# Altium PCB L50T-MAUe.PcbDoc (part 2 of 2)
Units mm, origin at the board's own origin, x right, y up, seen from the top; angles counter-clockwise.
Board outline 170.25 x 235.25 mm, 2 copper layers (Top Layer, Bottom Layer); 116 components, 84 nets, 377 pads, 326 vias.
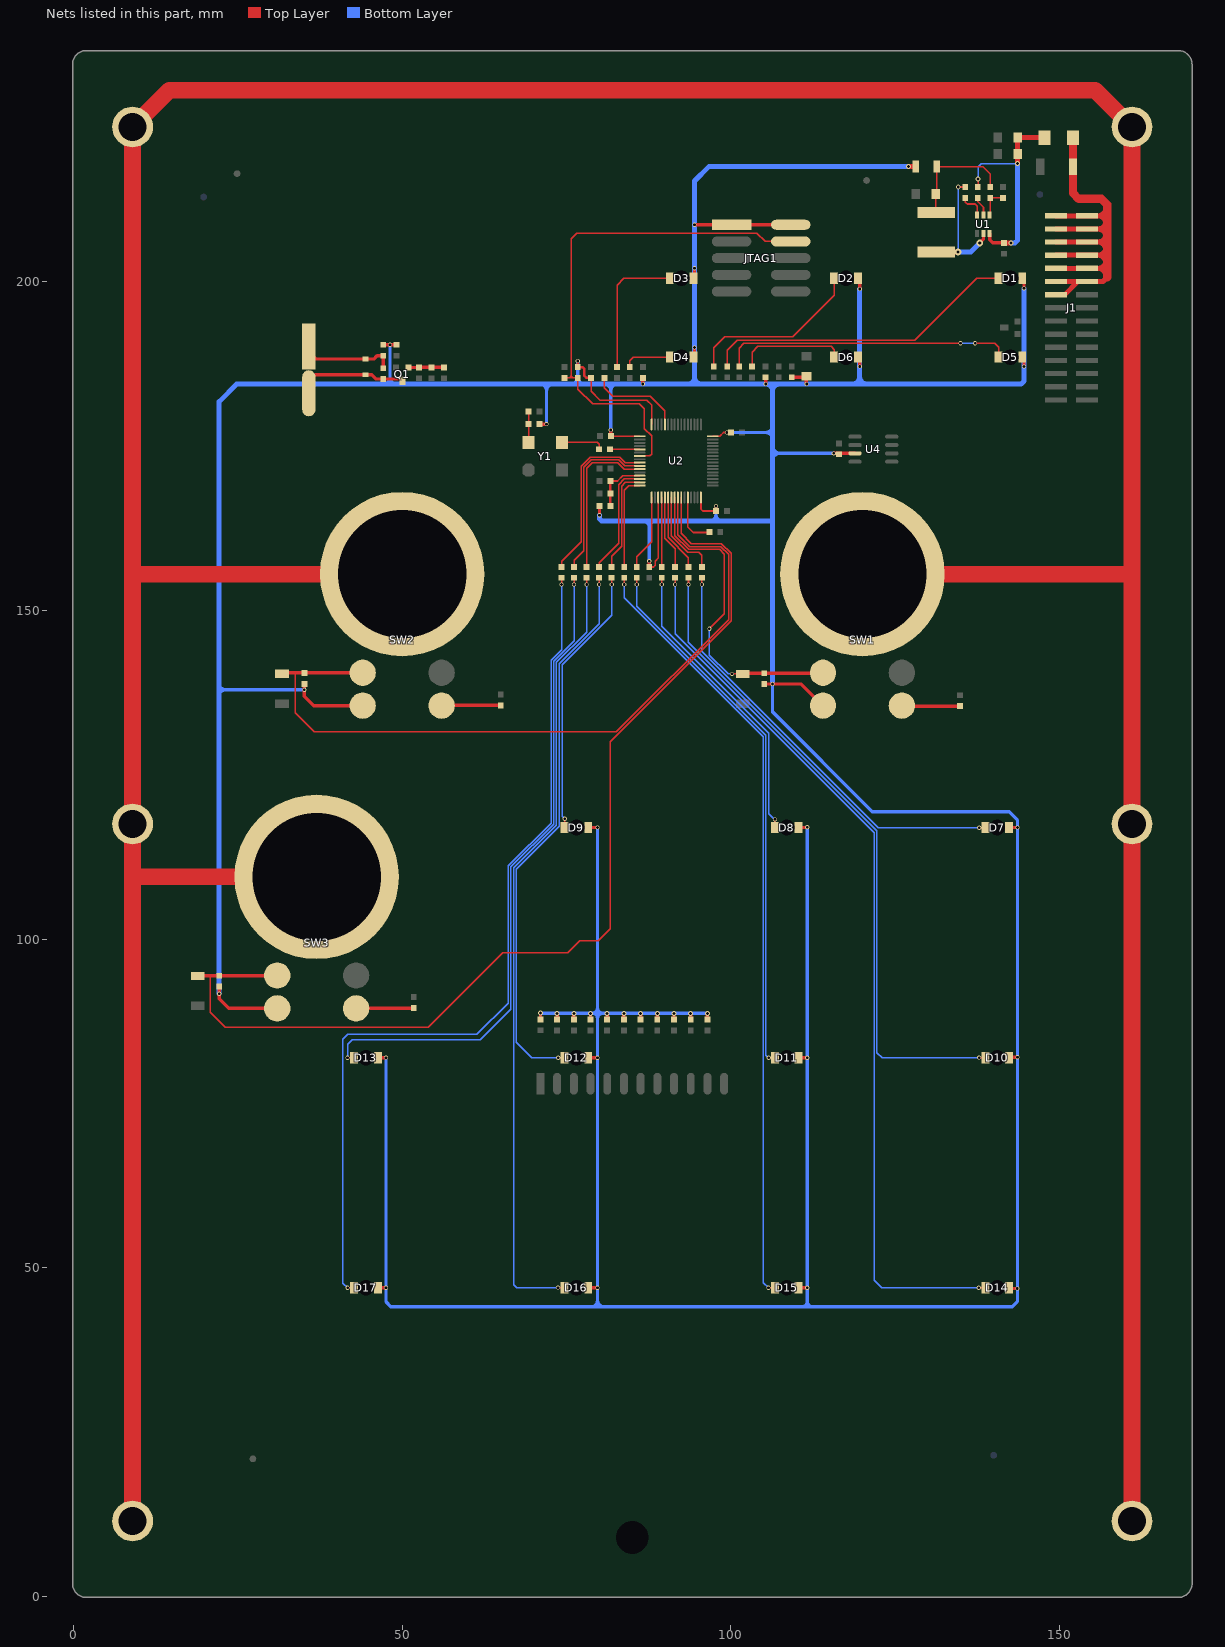
[diagram p2: the nets of this part, all layers, seen from the top]

## Via types
v1: diameter 0.635, hole 0.406, Top Layer to Bottom Layer, tented both sides, 289 vias
v2: diameter 0.762, hole 0.457, Top Layer to Bottom Layer, tented both sides, 34 vias
v3: diameter 1.016, hole 0.508, Top Layer to Bottom Layer, tented both sides, 2 vias
v4: diameter 0.711, hole 0.406, Top Layer to Bottom Layer, tented both sides, 1 vias

## Nets (pads, with @x,y where several pads share a name; then routed paths per layer and width w, separated by ;. In a path a pad name is that pad's centre, name@x,y a point inside that pad or via, vN(x,y) a via of type N, cw(c..) or ccw(c..) an arc to the next point about the centre after c; other vN are vias at no path point) (continued)
NetC4_1: C4.1 L1.1 U1.2 | length 19.8
  Top Layer w0.254: v4(134.567,214.376) C4.1@135.636,214.376
  Top Layer w0.508: v3(137.856,205.854) 138.405,206.403 U1.2@138.405,207.312
  Top Layer w0.762: L1.1@131.242,204.493 v3(134.544,204.493)
  Bottom Layer w0.254: v3@134.567,204.493 134.567,206.5 v4(134.567,214.376)
  Bottom Layer w0.762: v3(134.544,204.493) 134.567,204.493 136.495,204.493 v3(137.856,205.854)
NetC4_2: C4.2 U1.6 | length 4.1
  Top Layer w0.254: C4.2@135.636,212.725 135.636,212.065 135.915,211.785 137.132,211.785 137.455,211.463 U1.6@137.455,210.112
NetC5_2: C5.2 F1.1 L1.2 R5.1 | length 17.9
  Top Layer w0.254: L1.2@131.242,210.493 131.166,210.569 C5.2@131.166,213.335 C5.2@131.292,213.461 ; C5.2@131.432,213.601 C5.2@131.292,213.461 ; R5.1@139.446,214.376 139.446,216.355 138.326,217.475 F1.1@131.292,217.475 C5.2@131.292,213.461
NetC7_1: C7.1 D18.2 R12.1 U3.1 | length 14.7
  Top Layer w0.508: U3.1@35.814,190.119 35.814,189.304 36.904,188.214 D18.2@44.45,188.214 45.667,188.214 46.175,188.722 R12.1@47.117,188.722 C7.1@47.117,186.817
NetC7_2: C7.2 D18.1 Q1.3 U3.2 | length 16.8
  Top Layer w0.508: U3.2@35.814,183.007 35.814,184.838 36.777,185.801 D18.1@44.45,185.801 45.413,185.801 46.048,185.166 C7.2@47.117,185.166 49.77,185.166 Q1.3@50.038,184.898
NetC8_2: C8.2 Q1.1 R17.2 R19.2 | length 5.4
  Top Layer w0.508: Q1.1@50.978,186.93 52.564,186.93 C8.2@52.578,186.944 R19.2@54.483,186.944 R17.2@56.388,186.944
NetC9_1: C9.1 FB1.1 Y1.4 | length 4.7
  Top Layer w0.203: Y1.4@69.215,175.523 FB1.1@69.215,178.308 C9.1@69.215,180.213
NetD1_2: D1.2 R1.2 | length 48.2
  Top Layer w0.203: R1.2@99.441,187.096 99.441,189.535 100.99,191.084 127.94,191.084 137.356,200.5 D1.2@140.7,200.5
NetD2_2: D2.2 R8.2 | length 27
  Top Layer w0.203: R8.2@97.384,187.096 97.384,189.89 99.085,191.592 109.372,191.592 115.7,197.92 D2.2@115.7,200.5
NetD3_2: D3.2 R6.2 | length 20.9
  Top Layer w0.203: R6.2@82.677,186.995 82.677,199.441 83.736,200.5 D3.2@90.7,200.5
NetD4_2: D4.2 R9.2 | length 7.3
  Top Layer w0.203: R9.2@84.607,186.995 84.607,187.96 85.166,188.519 90.681,188.519 D4.2@90.7,188.5
NetD5_2: D5.2 R10.2 | length 44.3
  Top Layer w0.203: R10.2@101.27,187.096 101.27,189.865 101.981,190.576 v1@134.925,190.576 ; v1(137.135,190.602) 140.132,190.602 140.7,190.033 D5.2@140.7,188.5
  Bottom Layer w0.203: v1(134.925,190.602) v1(137.135,190.602)
NetD6_2: D6.2 R11.2 | length 16.4
  Top Layer w0.203: R11.2@103.226,187.071 103.226,189.281 104.064,190.119 115.24,190.119 115.7,189.659 D6.2@115.7,188.5
NetD7_2: D7.2 R24.2 | length 65.5
  Top Layer w0.203: v1@137.726,116.96 D7.2@138.7,116.96
  Top Layer w0.254: v1(95.578,153.924) R24.2@95.578,154.94
  Bottom Layer w0.203: v1(95.578,153.924) 95.578,143.764 122.382,116.96 137.751,116.96 v1(137.77,116.942)
NetD8_2: D8.2 R25.2 | length 45.2
  Top Layer w0.203: D8.2@106.7,116.96 v1(106.7,118.206)
  Top Layer w0.254: v1(89.482,153.924) R25.2@89.482,154.94
  Bottom Layer w0.203: v1(89.482,153.924) 89.482,147.574 105.738,131.318 105.738,119.075 106.607,118.206 v1(106.7,118.206)
NetD9_2: D9.2 R29.2 | length 41.2
  Top Layer w0.203: D9.2@74.7,116.96 74.727,116.987 v1(74.727,118.288)
  Top Layer w0.254: v1(81.862,153.924) R29.2@81.862,154.94
  Bottom Layer w0.203: v1(74.727,118.288) 74.369,118.646 74.369,141.732 81.862,149.225 v1(81.862,153.924)
NetD10_2: D10.2 R30.2 | length 100.9
  Top Layer w0.254: v1(93.546,153.924) R30.2@93.546,154.94 ; v1(137.744,81.966) 137.75,81.96 D10.2@138.7,81.96
  Bottom Layer w0.203: v1(93.546,153.924) 93.546,145.161 122.204,116.503 122.204,82.748 122.987,81.966 v1(137.744,81.966)
NetD11_2: D11.2 R31.2 | length 82.3
  Top Layer w0.203: v1(105.74,81.96) D11.2@106.7,81.96
  Top Layer w0.254: v1(85.672,153.924) R31.2@85.672,154.94
  Bottom Layer w0.203: v1(85.672,153.924) 85.672,150.622 105.332,130.962 105.332,82.369 v1(105.74,81.96)
NetD12_2: D12.2 R32.2 | length 84.2
  Top Layer w0.203: v1(73.742,81.96) D12.2@74.7,81.96
  Top Layer w0.254: v1(79.957,153.924) R32.2@79.957,154.94
  Bottom Layer w0.203: v1(73.742,81.96) 69.727,81.96 67.359,84.328 67.359,110.642 73.861,117.145 73.861,141.859 79.957,147.955 v1(79.957,153.924)
NetD13_2: D13.2 R33.2 | length 99.7
  Top Layer w0.203: v1(41.701,81.96) D13.2@42.7,81.96 ; v1(76.147,153.924) R33.2@76.147,154.94
  Bottom Layer w0.203: v1(41.701,81.96) 41.701,83.967 42.393,84.658 61.898,84.658 66.546,89.306 66.546,110.979 73.048,117.481 73.048,142.256 76.147,145.355 v1(76.147,153.924)
NetD14_2: D14.2 R34.2 | length 136.8
  Top Layer w0.203: v1(137.698,46.96) D14.2@138.7,46.96
  Top Layer w0.254: v1(91.514,153.924) R34.2@91.514,154.94
  Bottom Layer w0.203: v1(91.514,153.924) 91.514,146.431 121.798,116.147 121.793,116.142 121.793,48.082 122.915,46.96 v1(137.698,46.96)
NetD15_2: D15.2 R35.2 | length 118.1
  Top Layer w0.203: v1(105.715,46.96) D15.2@106.7,46.96
  Top Layer w0.254: v1(83.767,153.924) R35.2@83.767,154.94
  Bottom Layer w0.203: v1(83.767,153.924) 83.767,151.916 104.925,130.758 104.925,47.75 v1(105.715,46.96)
NetD16_2: D16.2 R36.2 | length 120
  Top Layer w0.203: v1@73.711,46.965 73.715,46.96 D16.2@74.7,46.96 ; v1(78.052,153.924) R36.2@78.052,154.94
  Bottom Layer w0.203: v1(73.711,46.99) 67.412,46.99 66.952,47.449 66.952,110.811 73.455,117.313 73.455,142.088 78.052,146.685 v1(78.052,153.924)
NetD17_2: D17.2 R38.2 | length 134.6
  Top Layer w0.203: v1(41.711,46.96) D17.2@42.7,46.96 ; v1(74.242,153.924) R38.2@74.242,154.94
  Bottom Layer w0.203: v1(41.711,46.96) 40.996,47.676 40.996,84.785 41.707,85.496 61.364,85.496 66.139,90.272 66.139,111.147 72.642,117.65 72.642,142.424 74.242,144.024 v1(74.242,153.924)
NetR2_2: R2.2 U2.60 | length 14.2
  Top Layer w0.203: R2.2@80.77,185.344 80.77,183.822 82.017,182.575 87.706,182.575 89.944,180.337 U2.60@89.944,178.27
NetR3_2: R3.2 U2.28 | length 8.2
  Top Layer w0.254: U2.28@93.464,167.15 U2.28@93.444,167.17 93.444,162.662 94.263,161.843 96.639,161.843 R3.2@96.721,161.925
NetR4_1: R4.1 U1.5 | length 3
  Top Layer w0.254: R4.1@137.541,212.725 137.541,212.164 138.405,211.3 U1.5@138.405,210.112
NetR5_2: R5.2 R7.1 U1.4 | length 4.6
  Top Layer w0.254: U1.4@139.355,210.112 139.446,210.203 R5.2@139.446,212.725 R7.1@141.351,212.725
NetR20_2: R20.2 Y1.3 | length 6.5
  Top Layer w0.203: Y1.3@74.295,175.523 79.694,175.523 79.957,175.26 R20.2@79.957,174.498
NetR26_2: R26.2 SW1.4 | length 8.8
  Top Layer w0.508: SW1.4@126,135.5 126.067,135.433 R26.2@134.821,135.433
NetR27_2: R27.2 SW2.4 | length 9
  Top Layer w0.508: SW2.4@56,135.5 56.034,135.534 R27.2@64.996,135.534
NetR28_2: R28.2 SW3.4 | length 8.8
  Top Layer w0.508: SW3.4@43,89.46 51.688,89.46 R28.2@51.763,89.535
NRST: CU2.2 JTAG1.4 R16.1 U2.7 | length 81.1
  Top Layer w0.203: CU2.2@74.674,185.344 75.286,185.344 ; 76.098,185.344 cw(c76.097,185.751) 76.096,185.344 ; U2.7@86.144,173.47 87.643,173.47 87.935,173.761 87.935,176.53 86.817,177.648 86.817,180.645 86.081,181.381 78.969,181.381 76.706,183.644 R16.1@76.706,185.344 76.096,185.344 ; JTAG1.4@109.097,206.096 105.207,206.096 103.937,207.366 76.556,207.366 75.69,206.5 75.69,185.75 75.69,185.748 ; 75.286,185.344 ccw(c75.285,185.749) 75.69,185.748 ; 75.286,185.344 75.69,185.344 ; 75.69,185.344 76.096,185.344 ; 75.69,185.344 75.69,185.748 ; 75.69,185.748 ccw(c75.285,185.749) 75.69,185.749 ccw(c76.097,185.751) 75.69,185.748 ; 75.69,185.748 ccw(c76.097,185.751) 76.096,185.344
OSC_IN: R20.1 U2.5 | length 4.5
  Top Layer w0.203: R20.1@81.636,174.47 U2.5@86.144,174.47
  Top Layer w0.254: R20.1@81.608,174.498 R20.1@81.636,174.47
PG: I1.1 I2.1 I3.1 I4.1 I5.1 I6.1 SW1.0 SW2.0 SW3.0 | length 690.6
  Top Layer w2.54: I5.1@9,11.5 I3.1@9,117.5 9,155.423 ; 9.09,109.46 SW3.0@37,109.46 ; SW2.0@50,155.5 9.077,155.5 9,155.423 ; SW1.0@120,155.5 160.973,155.5 ; I6.1@161,11.5 I4.1@161,117.5 I2.1@161,223.5 155.392,229.108 14.608,229.108 I1.1@9,223.5 9,155.423
SIGNAL1: R23.1 SW3.1 U2.26 Z3.1 | length 164.7
  Top Layer w0.203: 20.803,94.412 20.803,88.875 23.089,86.589 53.973,86.589 65.301,97.917 75.182,97.917 77.036,99.771 79.794,99.771 81.623,101.6 81.623,130.002 100.048,148.428 100.048,158.658 98.551,160.155 93.974,160.155 92.444,161.685 U2.26@92.444,167.17
  Top Layer w0.508: Z3.1@18.921,94.386 18.946,94.412 20.803,94.412 R23.1@22.172,94.412 30.952,94.412 SW3.1@31,94.46
SIGNAL2: R22.1 SW2.1 U2.25 Z2.1 | length 117.1
  Top Layer w0.203: 33.706,140.5 33.706,134.417 36.601,131.521 82.567,131.521 99.642,148.596 99.642,158.49 98.477,159.655 93.767,159.655 91.944,161.478 U2.25@91.944,167.17
  Top Layer w0.508: Z2.1@31.748,140.335 31.913,140.5 33.706,140.5 SW2.1@44,140.5
SIGNAL3: R21.1 SW1.1 U2.24 Z1.1 | length 49.4
  Top Layer w0.203: U2.24@91.444,167.17 91.489,167.125 91.489,161.358 93.598,159.249 98.308,159.249 99.007,158.55 99.007,149.479 v1(96.721,147.193) ; v1(100.15,140.335) 101.776,140.335 Z1.1@101.801,140.31
  Top Layer w0.508: Z1.1@101.801,140.31 101.928,140.437 R21.1@105.078,140.437 113.937,140.437 SW1.1@114,140.5
  Bottom Layer w0.203: v1(96.721,147.193) 96.721,143.196 99.582,140.335 v1(100.15,140.335)
SPS12V: C1.2 C2.2 C3.1 D19.2 R4.2 U1.3 | length 34.6
  Top Layer w0.254: R4.2@137.541,214.376 137.59,214.425 v2(137.59,215.595)
  Top Layer w0.508: U1.3@139.355,207.312 139.355,206.337 139.812,205.88 C3.1@141.554,205.88
  Top Layer w0.762: C3.1@141.554,205.88 v2(142.568,205.88) ; v2(143.612,217.932) C2.2@143.612,219.38 C1.2@143.612,221.869 D19.2@147.701,221.869
  Bottom Layer w0.254: v2(137.59,215.595) 137.59,217.449 138.072,217.932 v2(143.612,217.932)
  Bottom Layer w0.762: v2(142.568,205.88) 143.216,205.88 143.612,206.276 v2(143.612,217.932)
SPS_12V: D19.1 D20.2 J1.1 J1.2 J1.3 J1.4 J1.5 J1.6 J1.7 J1.8 J1.9 J1.10 J1.11 J1.12 J1.13 | length 101
  Top Layer w0.762: J1.13@149.454,198 150.756,198 J1.12@152.756,200 ; J1.11@149.454,200 J1.12@152.756,200 ; J1.9@149.454,202 J1.10@154.153,202 155.981,202 ; J1.7@149.454,204 J1.8@154.153,204 155.981,204 ; J1.5@149.454,206 J1.6@154.153,206 155.981,206 ; J1.3@149.454,208 J1.4@154.153,208 155.981,208 ; J1.1@149.454,210 J1.2@154.153,210 157.142,210 ; D20.2@152.015,217.424 152.015,221.865 D19.1@152.019,221.869 ; 155.956,210 ccw(c155.762,211.261) 157.023,211.455 ; 155.981,208.001 ccw(c155.88,209.144) 157.019,209.003 ; 156.007,210 cw(c155.731,208.708) 157.019,209.003 ; 157.023,202.463 ccw(c155.734,202.711) 157.024,202.953 ; 157.023,204.47 ccw(c155.737,204.714) 157.023,204.956 ; 157.023,206.4 ccw(c155.703,206.679) 157.014,206.997 ; 157.023,207.518 cw(c155.743,207.28) 157.014,206.997 ; 157.023,208.432 ccw(c155.731,208.708) 157.019,209.003 ; 157.023,209.245 cw(c155.88,209.144) 157.019,209.003 ; 157.048,203.505 cw(c155.762,203.286) 157.024,202.953 ; 157.048,205.537 cw(c155.746,205.302) 157.023,204.956 ; 157.06,204 155.981,204 ; 157.13,206 155.981,206 ; 157.194,202 155.981,202 ; 157.226,200.635 157.048,200.457 ; 157.226,208.229 156.996,208 155.981,208 ; J1.12@152.756,200 J1.12@154.153,200 156.591,200 157.048,200.457 ; 155.981,202 cw(c155.743,200.695) 157.048,200.457 ; 155.981,202 ccw(c155.762,203.286) 157.024,202.953 ; 155.981,204 ccw(c155.746,205.302) 157.023,204.956 ; 155.981,204 cw(c155.734,202.711) 157.024,202.953 ; 155.981,206 ccw(c155.743,207.28) 157.014,206.997 ; 155.981,206 cw(c155.737,204.714) 157.023,204.956 ; 155.981,208 cw(c155.703,206.679) 157.014,206.997
  Top Layer w1.27: D19.1@152.019,221.869 152.019,217.428 D20.2@152.015,217.424 152.015,213.44 152.883,212.573 156.362,212.573 157.226,211.709 157.226,208.229 157.226,200.635
STEP0: R24.1 U2.23 | length 13.5
  Top Layer w0.203: U2.23@90.944,167.17 90.944,161.328 93.43,158.842 95.105,158.842 95.578,158.369 R24.1@95.578,156.591
STEP1: R25.1 U2.20 | length 10.7
  Top Layer w0.203: R25.1@89.228,156.591 89.444,156.807 U2.20@89.444,167.17
STEP2: R29.1 U2.15 | length 15.9
  Top Layer w0.203: R29.1@81.862,156.591 81.862,158.242 83.361,159.741 83.361,168.885 83.946,169.47 U2.15@86.144,169.47
STEP4: R30.1 U2.22 | length 11.9
  Top Layer w0.203: U2.22@90.444,167.17 90.444,161.09 93.546,157.988 R30.1@93.546,156.591
STEP5: R31.1 U2.17 | length 11.5
  Top Layer w0.203: R31.1@85.672,156.591 85.672,158.115 87.944,160.387 U2.17@87.944,167.17
STEP6: R32.1 U2.14 | length 17.3
  Top Layer w0.203: R32.1@79.957,156.591 79.957,157.226 82.954,160.223 82.954,169.113 83.811,169.97 U2.14@86.144,169.97
STEP7: R33.1 U2.10 | length 25.1
  Top Layer w0.203: R33.1@76.147,156.591 76.147,157.607 77.62,159.08 77.62,171.756 78.737,172.872 82.955,172.872 83.858,171.97 U2.10@86.144,171.97
STEP8: R34.1 U2.21 | length 11.2
  Top Layer w0.203: U2.21@89.944,167.17 89.944,160.955 91.514,159.385 R34.1@91.514,156.591
STEP9: R35.1 U2.16 | length 14.3
  Top Layer w0.203: R35.1@83.767,156.591 83.767,168.275 84.462,168.97 U2.16@86.144,168.97
STEP10: R36.1 U2.11 | length 23.9
  Top Layer w0.203: R36.1@78.052,156.591 78.052,171.577 78.941,172.466 82.751,172.466 83.747,171.47 U2.11@86.144,171.47
STEP11: R38.1 U2.9 | length 26.4
  Top Layer w0.203: R38.1@74.242,156.591 74.242,157.48 77.214,160.452 77.214,171.924 78.568,173.279 83.124,173.279 83.932,172.47 U2.9@86.144,172.47
V3.3: C6.1 C10.2 C12.1 CU1.2 CU4.2 CU5.2 CU6.2 CU7.2 D1.1 D2.1 D3.1 D4.1 D5.1 D6.1 D7.1 D8.1 D9.1 D10.1 D11.1 D12.1 D13.1 D14.1 D15.1 D16.1 D17.1 F1.2 FB1.2 FB2.1 JTAG1.1 JTAG1.2 R12.2 R13.2 R14.2 R15.2 R16.2 R21.2 R22.2 R23.2 R40.1 R41.1 R42.1 R43.1 R44.1 R45.1 R46.1 R47.1 R48.1 R49.1 R50.1 SW1.3 SW2.3 SW3.3 U2.1 U2.19 U2.32 U2.48 U2.64 U4.3 | length 1056.7
  Top Layer w0.254: CU7.2@78.738,185.344 78.738,183.314 80.086,181.966 87.198,181.966 87.944,181.22 U2.64@87.944,178.27 ; CU4.2@81.735,176.53 81.795,176.47 U2.1@86.144,176.47 ; CU5.2@87.577,156.591 88.212,156.591 88.466,156.845 88.466,157.48 88.944,157.958 U2.19@88.944,167.17 ; U2.32@95.444,167.17 95.444,165.361 95.705,165.1 CU6.2@97.737,165.1 ; U2.48@97.244,176.47 98.312,176.47 98.88,177.038 v1(99.388,177.038) CU1.2@100.023,177.038
  Top Layer w0.381: v1(76.706,187.909) R16.2@76.706,186.995 77.445,186.995 77.724,186.715 77.724,185.674 78.054,185.344 CU7.2@78.738,185.344
  Top Layer w0.508: R23.2@22.172,92.761 v1(22.172,91.694) 22.172,90.932 23.644,89.46 SW3.3@31,89.46 ; R22.2@35.126,138.811 v1(35.126,137.922) 35.126,136.906 36.532,135.5 SW2.3@44,135.5 ; D17.1@46.3,46.96 v1(47.544,46.96) ; D13.1@46.3,81.96 v1@47.543,81.96 ; R12.2@47.117,190.373 v1(48.156,190.373) C6.1@49.149,190.373 ; FB1.2@70.866,178.308 v1(71.956,178.308) ; R40.1@71.03,87.782 v2(71.03,88.722) ; R41.1@73.571,87.757 v2(73.571,88.697) ; R42.1@76.111,87.757 v2(76.111,88.697) ; D16.1@78.3,46.96 v1(79.705,46.96) ; D12.1@78.3,81.96 v1(79.699,81.96) ; D9.1@78.3,116.96 v1(79.698,116.96) ; R43.1@78.638,87.757 v2(78.638,88.697) ; v1(80.01,164.465) FB2.1@80.01,165.862 ; R44.1@81.179,87.757 v2(81.179,88.697) ; CU4.2@81.735,176.53 v1(81.735,177.419) ; R45.1@83.719,87.757 v2(83.719,88.697) ; R46.1@86.26,87.757 v2(86.26,88.697) ; v1@86.612,184.406 R15.2@86.612,185.344 ; CU5.2@87.577,156.591 v1(87.577,157.48) ; R47.1@88.8,87.757 v2(88.8,88.697) ; R48.1@91.341,87.757 v2(91.341,88.697) ; R49.1@93.882,87.757 v2(93.882,88.697) ; D4.1@94.3,188.5 94.463,188.663 v1(94.463,189.967) ; D3.1@94.3,200.5 94.463,200.663 v1(94.463,202.032) ; v1(94.463,208.636) JTAG1.1@100.097,208.636 JTAG1.2@109.097,208.636 ; R50.1@96.422,87.757 v2(96.422,88.697) ; CU6.2@97.737,165.1 v1(97.737,165.862) ; R21.2@105.078,138.786 v1(106.322,138.786) 110.714,138.786 SW1.3@114,135.5 ; v1(105.281,184.406) R14.2@105.281,185.443 ; R13.2@109.243,185.443 111.326,185.443 C10.2@111.481,185.598 111.481,184.429 v1(111.506,184.404) ; D15.1@110.3,46.96 v1(111.603,46.96) ; D11.1@110.3,81.96 v1(111.602,81.96) ; D8.1@110.3,116.96 v1@111.601,116.96 ; v1(115.644,173.863) U4.3@118.872,173.863 ; D6.1@119.3,188.5 119.583,188.217 v1(119.583,187.071) ; D2.1@119.3,200.5 119.583,200.217 v1(119.583,198.857) ; v2@126.947,217.424 v2(126.998,217.475) ; D14.1@142.3,46.96 142.397,46.863 v1(143.561,46.863) ; D10.1@142.3,81.96 142.357,82.017 v1(143.579,82.017) ; D7.1@142.3,116.96 v1(143.579,116.96) ; D5.1@144.3,188.5 144.577,188.223 v1(144.577,187.071) ; D1.1@144.3,200.5 144.577,200.223 v1(144.577,198.958)
  Top Layer w0.762: v2(126.998,217.475) F1.2@128.092,217.475
  Bottom Layer w0.381: 76.706,184.482 76.784,184.404
  Bottom Layer w0.508: 22.172,137.033 cw(c23.125,136.97) 23.061,137.922 ; 22.172,137.922 23.061,137.922 ; 22.172,138.938 ccw(c23.124,138.874) 22.172,138.811 ccw(c23.124,138.874) 23.061,137.922 ; 23.188,137.922 ccw(c23.125,136.97) 23.061,137.922 ; v1(35.126,137.922) 23.061,137.922 ; 47.191,184.404 ccw(c47.166,185.395) 48.156,185.369 ; v1(47.549,81.966) 47.549,44.806 48.285,44.069 78.791,44.069 ; 48.156,184.48 48.156,185.344 ; v1(48.156,190.373) 48.156,185.42 ; 48.918,184.404 ccw(c49.007,185.255) 49.096,184.404 cw(c49.109,185.357) 48.156,185.344 ; 70.94,184.404 cw(c70.94,183.388) 71.956,183.388 ; v2(71.03,88.722) 79.705,88.722 ; v1(71.956,178.308) 71.956,183.388 ; 71.956,184.404 71.956,183.388 ; 72.972,184.404 ccw(c72.972,183.388) 71.956,183.388 ; 75.616,184.404 ccw(c75.602,185.508) 76.706,185.494 ; 76.706,184.482 76.706,185.494 ; 76.706,185.522 cw(c75.602,185.508) 76.706,185.494 ; v1(76.706,187.909) 76.706,185.494 ; 76.708,185.522 ccw(c77.813,185.509) 77.8,184.404 ; 78.765,44.069 ccw(c78.778,44.996) 78.791,44.069 ; v1(79.698,116.96) 79.705,89.431 ; 80.719,184.404 cw(c80.719,183.388) 81.735,183.388 ; 81.608,184.404 81.735,184.277 81.735,183.388 ; v1(81.735,177.419) 81.735,183.388 ; 82.751,184.404 ccw(c82.751,183.388) 81.735,183.388 ; 86.307,163.576 cw(c86.498,162.497) 86.688,163.576 ; 86.815,163.449 cw(c86.815,162.687) 87.577,162.687 cw(c88.529,162.624) 88.466,163.576 ; v1(87.577,157.48) 87.577,163.449 ; v2(96.422,88.697) 96.397,88.722 80.518,88.722 ; 96.721,163.576 ccw(c96.721,164.592) 97.735,164.527 ; v1(97.737,165.862) 97.737,164.465 ; 97.864,163.576 97.737,163.703 97.737,164.465 ; 98.626,163.576 cw(c98.689,164.528) 97.737,164.465 ; v1(99.388,177.038) 105.23,177.038 ; v1(106.322,138.786) 106.322,134.544 121.486,119.38 142.316,119.38 143.579,118.117 v1(143.579,116.96) v1(143.579,82.017) 143.579,44.875 142.773,44.069 112.395,44.069 ; 106.322,172.847 cw(c107.427,172.758) 107.338,173.863 ; 106.322,173.863 107.338,173.863 ; 106.322,175.26 ccw(c107.554,175.095) 106.322,174.93 ccw(c107.554,175.095) 107.373,173.865 ; 106.322,176.022 ccw(c105.268,175.984) 105.306,177.038 ; 106.322,177.038 105.306,177.038 ; 106.322,178.054 cw(c105.268,178.092) 105.306,177.038 ; 107.389,173.863 cw(c107.554,175.095) 107.373,173.865 ; 107.516,173.863 ccw(c107.427,172.758) 107.373,173.865 ; 110.846,44.069 ccw(c110.82,44.856) 111.608,44.831 ; v1(111.608,116.992) 111.608,44.882 ; v1(115.644,173.863) 107.338,173.863 ; 48.156,185.344 cw(c49.109,185.357) 48.156,185.369 ; 48.156,185.344 48.156,185.369 ; 48.156,185.369 ccw(c47.166,185.395) 48.156,185.42 ; 48.156,185.369 48.156,185.42 ; 78.791,44.069 ccw(c78.778,44.996) 79.705,44.983 ; 78.791,44.069 79.781,44.069 ; 79.705,44.983 ccw(c80.721,45.085) 80.62,44.069 ; 79.705,44.983 v1(79.705,46.96) 79.705,88.722 ; 79.705,44.983 79.705,44.145 79.781,44.069 ; 79.705,88.722 79.705,89.431 ; 79.705,88.722 80.416,88.722 ; 79.705,89.431 cw(c78.943,89.484) 78.994,88.722 cw(c78.994,88.011) 79.705,88.011 cw(c80.467,87.96) 80.416,88.722 ; 79.705,89.431 ccw(c78.943,89.484) 79.707,89.483 ; 79.707,89.483 ccw(c78.943,89.484) 79.705,89.535 ccw(c80.518,89.535) 79.707,89.483 ; 79.707,89.483 ccw(c80.518,89.535) 80.466,88.724 ; 79.781,44.069 80.62,44.069 ; 80.416,88.722 cw(c80.467,87.96) 80.466,88.724 ; 80.416,88.722 80.518,88.722 ; 80.466,88.724 cw(c80.467,87.96) 80.518,88.722 ; 80.466,88.724 ccw(c80.518,89.535) 80.518,88.722 ; 80.62,44.069 ccw(c80.721,45.085) 80.823,44.069 ; 80.62,44.069 80.823,44.069 ; 80.823,44.069 111.608,44.069 ; 97.735,164.527 ccw(c98.689,164.528) 97.737,164.465 ; 97.735,164.527 ccw(c96.721,164.592) 97.737,164.592 ccw(c98.689,164.528) 97.735,164.527 ; 105.23,177.038 ccw(c105.268,178.092) 105.306,177.038 ; 105.23,177.038 cw(c105.268,175.984) 105.306,177.038 ; 105.23,177.038 105.306,177.038 ; 107.338,173.863 cw(c107.427,172.758) 107.373,173.865 ; 111.608,44.069 111.608,44.831 ; 111.608,44.069 112.395,44.069 ; 111.608,44.831 ccw(c110.82,44.856) 111.608,44.844 ; 111.608,44.831 111.608,44.856 ; 111.608,44.844 cw(c112.408,44.869) 111.608,44.856 ; 111.608,44.844 ccw(c110.82,44.856) 111.608,44.882 ; 111.608,44.844 ccw(c112.408,44.869) 112.395,44.069 ; 111.608,44.856 cw(c112.408,44.869) 111.608,44.882 ; 111.608,44.856 111.608,44.882
  Bottom Layer w0.762: v1(22.172,91.694) 22.172,137.922 22.172,138.811 22.172,138.938 22.172,181.737 24.839,184.404 48.918,184.404 49.096,184.404 70.94,184.404 71.956,184.404 72.972,184.404 75.616,184.404 76.784,184.404 77.8,184.404 80.719,184.404 81.608,184.404 82.751,184.404 v1(86.614,184.404) 92.098,184.404 ; v1(80.01,164.465) 80.01,163.904 80.338,163.576 86.307,163.576 88.466,163.576 96.721,163.576 97.864,163.576 106.322,163.576 ; 92.225,184.404 92.098,184.404 ; 93.523,184.404 ccw(c93.485,185.382) 94.463,185.344 ; 95.479,184.404 cw(c95.479,185.42) 94.463,185.381 ; v1@105.23,184.404 cw(c105.306,183.388) v1@105.382,184.404 ; v1(106.322,138.786) 106.322,163.576 ; v1(119.583,198.857) v1(119.583,187.071) 119.583,185.445 ; 120.777,184.404 cw(c120.701,185.522) 120.625,184.404 ; v2(126.998,217.475) 96.647,217.475 94.463,215.29 v1(94.463,208.636) v1(94.463,202.032) v1(94.463,189.967) 94.463,185.42 ; v1(144.577,198.958) v1(144.577,187.071) 144.577,184.836 144.145,184.404 120.625,184.404 ; 92.098,184.404 94.469,184.404 ; 94.463,185.344 ccw(c93.485,185.382) 94.463,185.381 ; 94.463,185.344 94.463,185.42 ; 94.463,185.344 94.463,184.41 94.469,184.404 ; 94.463,185.42 ccw(c95.479,185.42) 94.463,185.381 ; 94.463,185.42 cw(c93.485,185.382) 94.463,185.381 ; 94.469,184.404 102.258,184.404 v1@105.382,184.404 ; v1@105.382,184.404 cw(c105.306,183.388) 106.322,183.464 ; v1@105.382,184.404 106.322,184.404 ; 106.322,163.576 106.322,172.847 106.322,173.863 106.322,174.93 106.322,175.26 106.322,176.022 106.322,177.038 106.322,178.054 106.322,183.464 ; 106.322,183.464 cw(c107.364,183.363) 107.262,184.404 ; 106.322,183.464 106.322,184.404 ; 106.322,184.404 107.262,184.404 ; 107.262,184.404 v1(111.506,184.404) 118.415,184.404 ; 118.415,184.404 ccw(c118.478,185.509) 118.542,184.404 ; 118.415,184.404 118.542,184.404 ; 118.542,184.404 ccw(c118.478,185.509) 119.583,185.445 ; 118.542,184.404 119.583,184.404 ; 119.583,184.404 119.583,185.445 ; 119.583,184.404 120.625,184.404 ; 119.583,185.445 ccw(c120.701,185.522) 120.625,184.404
V3.3A: CU3.1 CU8.1 FB2.2 U2.13 | length 8.6
  Top Layer w0.254: CU8.1@81.661,169.672 82.751,169.672 83.549,170.47 U2.13@86.144,170.47
  Top Layer w0.381: FB2.2@81.661,165.862 CU3.1@81.661,167.767 CU8.1@81.661,169.672
pads on no net: D1.0 D2.0 D3.0 D4.0 D5.0 D6.0 D7.0 D8.0 D9.0 D10.0 D11.0 D12.0 D13.0 D14.0 D15.0 D16.0 D17.0 J1.23 J1.25 U2.2 U2.6 U2.42 U2.43 U2.57 U2.59 U2.61 U2.62 U4.5 U4.8 Y1.1

## Polygon pours and split planes (outlines as drawn)
DGND on Top Layer "Top Layer-No Net 1" (solid, remove dead copper, pour order 32): 99.111,69.672 155.016,69.672 155.016,72.263 155.016,223.393 152.883,223.393 14.961,223.393 14.961,218.084 14.961,69.672 99.111,69.672
DGND on Bottom Layer "Top Layer-No Net 1" (solid, remove dead copper, pour order 34): 154.991,69.672 154.991,223.342 154.991,223.368 154.991,223.393 14.961,223.393 14.961,69.672 154.991,69.672

## Keep-outs
Keep-Out Layer:
  lines w0.254: 0,2 ccw(c2,2) 2,0 ; 0,2.025 0,233 cw(c2,233) 2,235 168,235 cw(c168,233) 170,233 170,2 cw(c168,2) 168,0

## Other copper
Top Layer:
  pour cut-out: 67.807,177.031 75.703,177.031 75.703,169.845 75.657,169.799 67.818,169.799 67.818,177.02
  pour cut-out: 127.967,218.44 131.824,218.44 131.867,218.397 131.867,216.553 127.985,216.553 127.967,216.535

## Silkscreen, mask and mechanical layers (free items; w line width, h text height)
Top Overlay:
  text "1.5A" at 128.27,220.599 h1.02
  text "RED" at 80.221,116.51 h0.89
  text "YELLOW" at 112.221,116.51 h0.89
  text "FN" at 144.221,116.51 h0.89
  text "4" at 48.221,81.51 h0.89
  text "3" at 80.221,81.51 h0.89
  text "2" at 112.221,81.51 h0.89
  text "1" at 144.221,81.51 h0.89
  text "KEY1" at 71.829,64.77 h1.02 r90
  text "KEY2" at 74.369,64.77 h1.02 r90
  text "KEY3" at 77.036,64.77 h1.02 r90
  text "KEY4" at 79.576,64.77 h1.02 r90
  text "KEY5" at 81.989,64.77 h1.02 r90
  text "KEY6" at 84.783,64.77 h1.02 r90
  text "KEY7" at 87.196,64.77 h1.02 r90
  text "KEY8" at 89.863,64.77 h1.02 r90
  text "KEY9" at 92.149,64.77 h1.02 r90
  text "KEY10" at 94.689,64.77 h1.02 r90
  text "KEY11" at 97.356,64.77 h1.02 r90
  text "GND" at 99.769,64.77 h1.02 r90
  text "L50T-MAUe" at 86.335,57.15 h2.54
  text "GLL7.820.2573 SV2.0" at 86.538,52.248 h1.27
  text "8" at 48.221,46.51 h0.89
  text "7" at 80.221,46.51 h0.89
  text "6" at 112.221,46.51 h0.89
  text "5" at 144.221,46.51 h0.89
  text "SN:" at 66.04,34.048 h6.35
Bottom Overlay:
  lines w0.254: 15,15 155,15 155,17.5 155,220 15,220 15,15
  text "贴膜面" at 43.434,208.026 h7.62
  text "故障" at 95.146,195.097 h2.54
  text "运行" at 119.733,195.097 h2.54
  text "电源" at 144.854,195.097 h2.54
  text "自动" at 95.146,183.083 h2.54
  text "中心" at 119.733,183.083 h2.54
  text "等待" at 144.854,183.083 h2.54
  text "外灯" at 122.451,140.732 h2.54
  text "手控" at 52.601,140.716 h2.54
  text "步进" at 39.596,94.894 h2.54
Mechanical 1:
  lines w0.254: 0,2 0,233 cw(c2,233) 2,235 168,235 cw(c168,233) 170,233 170,2 cw(c168,2) 168,0 2,0
  lines w5: 60.5,9 109.5,9
Mechanical 15:
  text "开腰孔" at 81.915,3.937 h2.54

## Text inside footprints (layer, text, board x,y; h text height)
SW1: Top Overlay "-" at 128.687,135.056 h0.89; Top Overlay "C" at 128.712,140.184 h0.89; Top Overlay "+" at 110.17,135.053 h0.89; Top Overlay "NO" at 109.84,140.158 h0.89
SW2: Top Overlay "NO" at 39.84,140.158 h0.89; Top Overlay "+" at 40.17,135.053 h0.89; Top Overlay "C" at 58.712,140.184 h0.89; Top Overlay "-" at 58.687,135.056 h0.89
SW3: Top Overlay "NO" at 26.84,94.118 h0.89; Top Overlay "+" at 27.17,89.013 h0.89; Top Overlay "C" at 45.712,94.144 h0.89; Top Overlay "-" at 45.687,89.016 h0.89